# EAGLE board Honda Fit CAN Gateway (EAGLE 7.4.0)
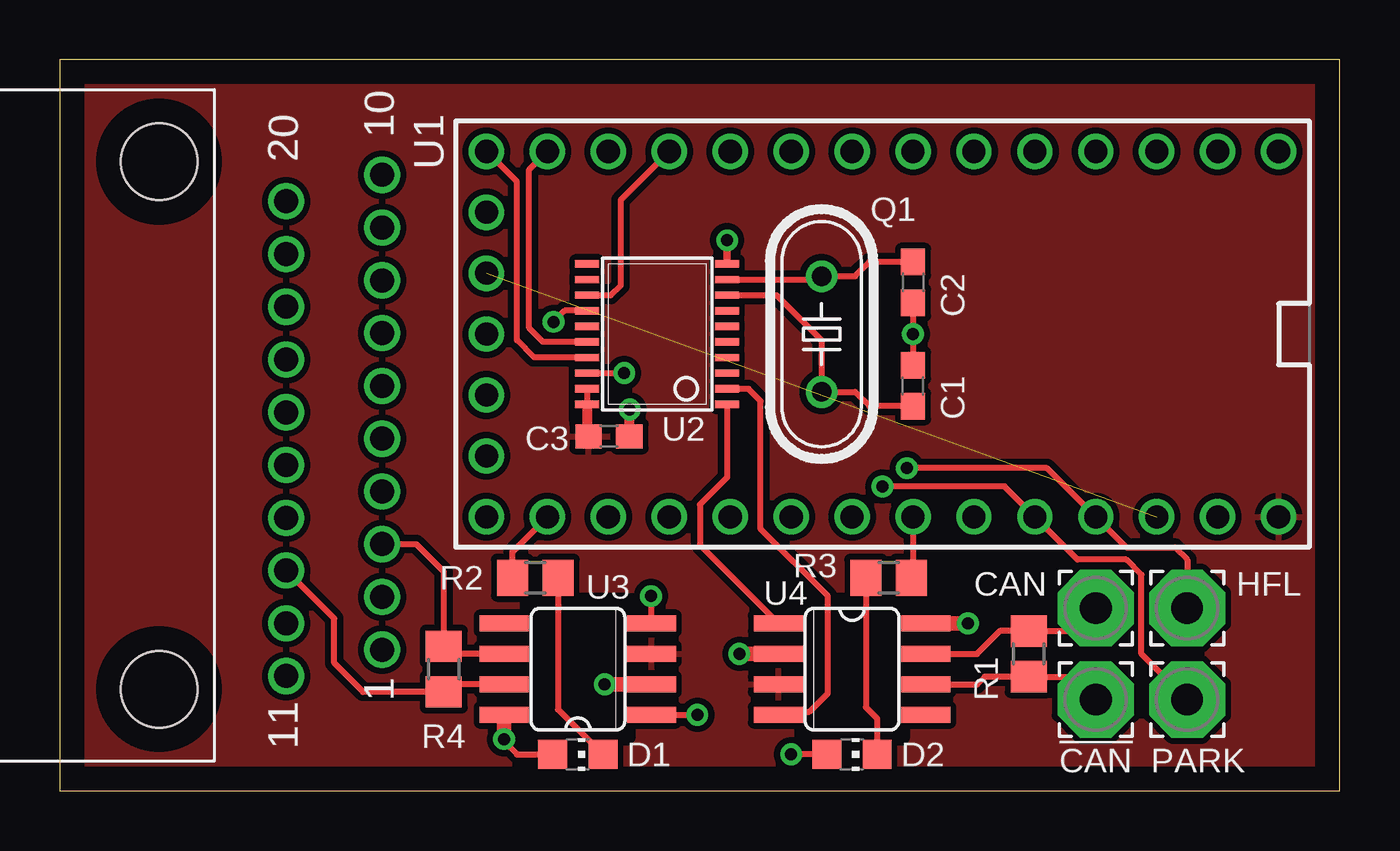
[diagram p0: board, top side]
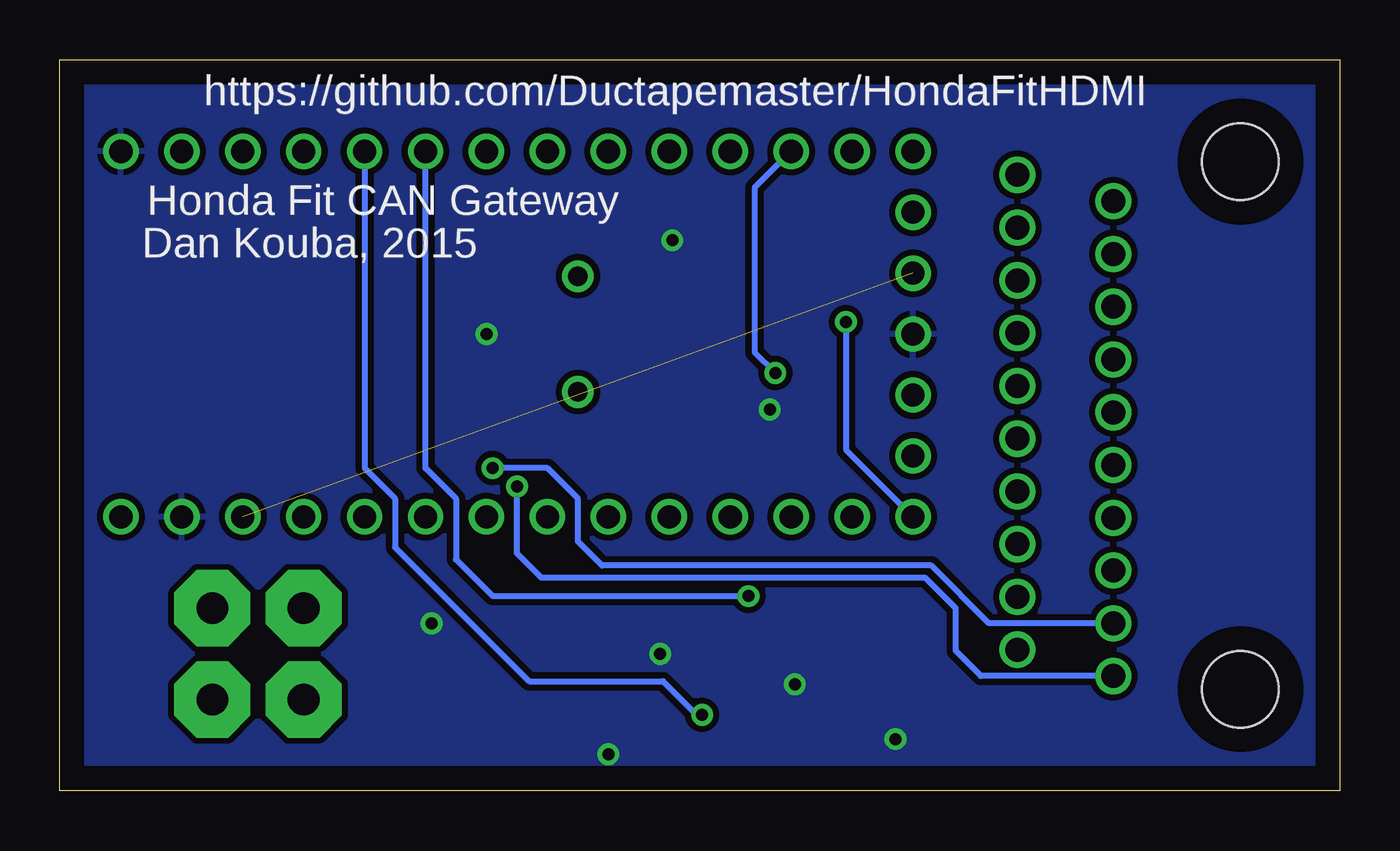
[diagram p1: board, bottom side, seen from below]

Size 53.34 x 30.48 mm. Coordinates in mm from the lower left corner, seen from the top.
Outline: 0,0 53.34,0 53.34,30.48 0,30.48 0,0
Copper layers (1*16): Top 0.035mm / dielectric 1.5mm / Bottom 0.035mm
Design rules "default": minimum track width 10mil, minimum drill 24mil, track to track 8mil, track to pad 8mil, pad to pad 8mil, via to via 8mil, smd to smd 8mil, copper to edge 40mil, drill to drill 8mil, minimum pad ring 10mil, minimum via ring 8mil, stop-mask expansion 4mil, vias tented up to drill 0mil, thermal gap 10mil
tRestrict: area 21.6,15.5 to 22.4,17.5; area 19.6,2.3 to 23.6,7.9; area 31,2.3 to 35.1,7.9

## Footprints (pad centres in the part's own frame; a part is rotated, then mirrored left to right if it is on the bottom)
C0603 = smd 1.1 x 1: 1 -0.85,0; 2 0.85,0
CHIP-LED0805 = smd 1.2 x 1.2: A 0,-1.05; C 0,1.05
3,17/1,3 = drill 1.321 pad 3.175 octagon: 1 0,0
HC49/S = drill 0.813: 1 -2.413,0; 2 2.413,0
R0805 = smd 1.3 x 1.5: 1 -0.95,0; 2 0.95,0
TEENSY_3.1_BASIC = drill 0.965: 0 -7.62,13.97; 1 -7.62,11.43; 2 -7.62,8.89; 3 -7.62,6.35; 3.3V 7.62,11.43; 3.3V1 -2.54,-16.51; 4 -7.62,3.81; 5 -7.62,1.27; 6 -7.62,-1.27; 7 -7.62,-3.81; 8 -7.62,-6.35; 9 -7.62,-8.89; 10 -7.62,-11.43; 11 -7.62,-13.97; 12 -7.62,-16.51; 13 7.62,-16.51; 14/A0 7.62,-13.97; 15/A1 7.62,-11.43; 16/A2 7.62,-8.89; 17/A3 7.62,-6.35; 18/A4 7.62,-3.81; 19/A5 7.62,-1.27; 20/A6 7.62,1.27; 21/A7 7.62,3.81; 22/A8 7.62,6.35; 23/A9 7.62,8.89; A14 5.08,-16.51; AGND 7.62,13.97; GND -7.62,16.51; GND1 0,-16.51; PGM 2.54,-16.51; VBAT -5.08,-16.51; VIN 7.62,16.51
TSSOP20 = smd 0.305 x 0.991: 1 -2.925,-2.918; 2 -2.275,-2.918; 3 -1.625,-2.918; 4 -0.975,-2.918; 5 -0.325,-2.918; 6 0.325,-2.918; 7 0.975,-2.918; 8 1.625,-2.918; 9 2.275,-2.918; 10 2.925,-2.918; 11 2.925,2.918; 12 2.275,2.918; 13 1.625,2.918; 14 0.975,2.918; 15 0.325,2.918; 16 -0.325,2.918; 17 -0.975,2.918; 18 -1.625,2.918; 19 -2.275,2.918; 20 -2.925,2.918
SO08 = smd 0.66 x 2.032: 1 -1.905,-3.073; 2 -0.635,-3.073; 3 0.635,-3.073; 4 1.905,-3.073; 5 1.905,3.073; 6 0.635,3.073; 7 -0.635,3.073; 8 -1.905,3.073
CON_10X2_JAE_MX34020NF1 = drill 1: P1 -2,9.35; P2 -2,7.15; P3 -2,4.95; P4 -2,2.75; P5 -2,0.55; P6 -2,-1.65; P7 -2,-3.85; P8 -2,-6.05; P9 -2,-8.25; P10 -2,-10.45; P11 2,10.45; P12 2,8.25; P13 2,6.05; P14 2,3.85; P15 2,1.65; P16 2,-0.55; P17 2,-2.75; P18 2,-4.95; P19 2,-7.15; P20 2,-9.35 | hole 3.2: 7.3,11; 7.3,-11

## Placement (x,y rotation side)
C1  [C0603]  35.56,16.89 90 top
C2  [C0603]  35.56,21.21 270 top
C3  100n  [C0603]  22.89,14.78 0 top
D1  [CHIP-LED0805]  21.59,1.52 270 top
D2  [CHIP-LED0805]  33.02,1.52 270 top
PAD1  [3,17/1,3]  43.18,7.62 0 top
PAD2  [3,17/1,3]  43.18,3.81 0 top
PAD3  [3,17/1,3]  46.99,3.81 0 top
PAD4  [3,17/1,3]  46.99,7.62 0 top
Q1  10MHz  [HC49/S]  31.75,19.05 270 top
R1  120R  [R0805]  40.39,5.71 270 top
R2  120R  [R0805]  19.81,8.89 180 top
R3  120R  [R0805]  34.54,8.89 0 top
R4  120R  [R0805]  16,5.08 90 top
U1  TEENSY_3.1_BASIC  [TEENSY_3.1_BASIC]  34.29,19.05 270 top
U2  MCP2515TSOP  [TSSOP20]  24.89,19.05 90 top
U3  TJA1050  [SO08]  21.59,5.08 90 top
U4  TJA1050  [SO08]  33.02,5.08 270 top
X1  CON_10X2F_JAE_MX34020NF1  [CON_10X2_JAE_MX34020NF1]  11.43,15.24 180 top

## Library data of the parts
C1-C3 R1-R4 = resistor
D1 D2 = led
PAD1-PAD4 = wirepad
Q1 = crystal; OC_FARNELL: 1667008; OC_NEWARK: unknown
U1 = Teensy_3_Series_Board_v1.0
U2 = MCP2515_MT
U3 U4 = can_driver
X1 = JAE_MX34

## Nets
3.3V: U1.3.3V U1.3.3V1
!BCAN: R4.2 U3.6 X1.P3
!CS: U1.10 U2.18
!HUCAN: PAD2.1 R1.2 U4.6
!INT: U1.9 U2.13
+5V: C3.1 U1.VIN U2.19 U2.20 U3.3 U4.3
BCAN: R4.1 U3.7 X1.P13
BCAN_LED: R2.2 U1.14/A0
BCAN_RX: U1.4 U3.4
BCAN_TX: U1.3 U3.1
GND: C1.2 C2.2 C3.2 D1.A D2.A U1.AGND U1.GND U1.GND1 U2.10 U3.2 U3.8 U4.2 U4.8
HFL: PAD4.1 U1.23/A9 X1.P12
HUCAN: PAD1.1 R1.1 U4.7
HUCAN_LED: R3.2 U1.20/A6
HUCAN_RX: U2.2 U4.4
HUCAN_TX: U2.1 U4.1
MISO: U1.12 U2.17
MOSI: U1.11 U2.16
N$1: C1.1 Q1.2 U2.8
N$2: C2.1 Q1.1 U2.9
N$3: U1.5
N$4: D1.C R2.1
N$5: D2.C R3.1
PARK_SW: PAD3.1 U1.22/A8 X1.P11
SCK: U1.13 U2.14
VBAT: U1.VBAT

## Tracks (layer width: path | path; a pad name or v marks a point on that pad's centre or on a via)
3.3V  (1 unrouted)
!BCAN
  Top 0.254: X1.P3 14.86,10.29 16,9.14 R4.2 16.32,5.71 U3.6
!CS  (via drill 0.5)
  Top 0.254: U2.18 v23.52,17.43 v23.52,17.42
  Bottom 0.254: U1.10 24.38,25.15 24.38,18.29 v23.52,17.42
!HUCAN
  Top 0.254: PAD2.1 42.23,4.76 R1.2 38.55,4.76 38.23,4.45 U4.6
!INT
  Top 0.254: U1.9 23.37,24.64 23.37,21.08 22.96,20.68 U2.13
+5V
  Top 0.254: U2.19 U2.20
  Top 0.406: U2.20 21.97,15 C3.1
  pour Top (isolate 0.254): 0,30.48 0,0 53.34,0 53.34,30.48
BCAN
  Top 0.254: X1.P13 11.43,7.19 11.43,5.33 12.63,4.13 R4.1 16.32,4.45 U3.7
BCAN_LED
  Top 0.254: U1.14/A0 18.86,9.97 R2.2
BCAN_RX  (via drill 0.5)
  Top 0.254: v24.64,8.13 24.64,7.01 U3.4
  Bottom 0.254: U1.4 38.1,13.46 36.83,12.19 36.83,9.65 35.31,8.13 v24.64,8.13
BCAN_TX  (via drill 0.5)
  Top 0.254: U3.1 v26.57,3.17
  Bottom 0.254: U1.3 40.64,13.46 39.37,12.19 39.37,10.16 33.78,4.57 28.19,4.57 26.8,3.17 v26.57,3.17
GND  (via drill 0.5)
  Top 0.254: D2.A v30.48,1.52 | v18.52,2.16 18.52,2.06 19.05,1.52 D1.A | C2.2 v35.56,19.05 C1.2
  Top 0.305: U2.10 v27.81,22.96
  Top 0.406: C3.2 23.73,15.89 v23.75,15.9
  Top 0.61: U3.2 v22.71,4.45 | U4.2 v28.32,5.71 | U4.8 v37.85,6.99 | U3.8 v18.52,2.16
  pour Bottom (isolate 0.254): 0,30.48 0,0 53.34,0 53.34,30.48
HFL  (via drill 0.5)
  Top 0.254: PAD4.1 46.99,9.65 46.48,10.16 44.45,10.16 U1.23/A9 41.15,13.46 v35.31,13.46
  Bottom 0.254: X1.P12 14.61,6.99 17.02,9.4 30.73,9.4 31.75,10.41 31.75,12.19 33.02,13.46 v35.31,13.46
HUCAN
  Top 0.254: PAD1.1 42.23,6.67 R1.1 39.18,6.67 38.23,5.71 U4.7
HUCAN_LED
  Top 0.254: U1.20/A6 35.56,8.96 R3.2
HUCAN_RX
  Top 0.254: U4.4 29.97,3.3 31.24,3.3 32,4.06 32,8.13 29.21,10.92 29.21,16.26 28.7,16.76 27.82,16.76 U2.2
HUCAN_TX
  Top 0.254: 29.72,7.11 U4.1 26.67,10.26 26.67,11.94 27.81,13.08 U2.1
MISO
  Top 0.254: U2.17 19.77,18.07 19.05,18.8 19.05,25.4 U1.12
MOSI
  Top 0.254: U2.16 20.14,18.73 19.56,19.3 19.56,25.91 U1.11
N$1
  Top 0.254: C1.1 33.74,16.04 33.15,16.64 Q1.2 31.75,18.8 29.87,20.68 U2.8
N$2
  Top 0.254: C2.1 33.74,22.06 33.15,21.46 Q1.1 31.61,21.32 U2.9
N$4
  Top 0.254: 22.61,1.52 22.61,1.56 D1.C 20.76,3.4 R2.1
N$5
  Top 0.254: R3.1 33.59,3.49 34.07,3.01 D2.C
PARK_SW  (via drill 0.5)
  Top 0.254: v34.29,12.7 39.37,12.7 U1.22/A8 42.42,9.65 44.45,9.65 45.09,9.02 45.09,5.71 PAD3.1
  Bottom 0.254: X1.P11 14.95,4.79 16,5.84 16,7.62 17.27,8.89 33.27,8.89 34.29,9.91 v34.29,12.7
SCK  (via drill 0.5)
  Top 0.254: U2.14 21.04,20.02 v20.57,19.56
  Bottom 0.254: v20.57,19.56 20.57,14.22 U1.13

## Text on the board
tNames: CAN | HFL | !CAN | PARK
bNames: https://github.com/Ductapemaster/HondaFitHDMI | Honda Fit CAN Gateway | Dan Kouba, 2015